# Altium PCB LEDArray8Key.PcbDoc (part 1 of 3)
Units mil, origin at the board's own origin, x right, y up, seen from the top; angles counter-clockwise.
Board outline 4724.41 x 3343 mil, 2 copper layers (Top Layer, Bottom Layer); 229 components, 203 nets, 838 pads, 171 vias.
Unrouted connection lines stored in the file: 34.
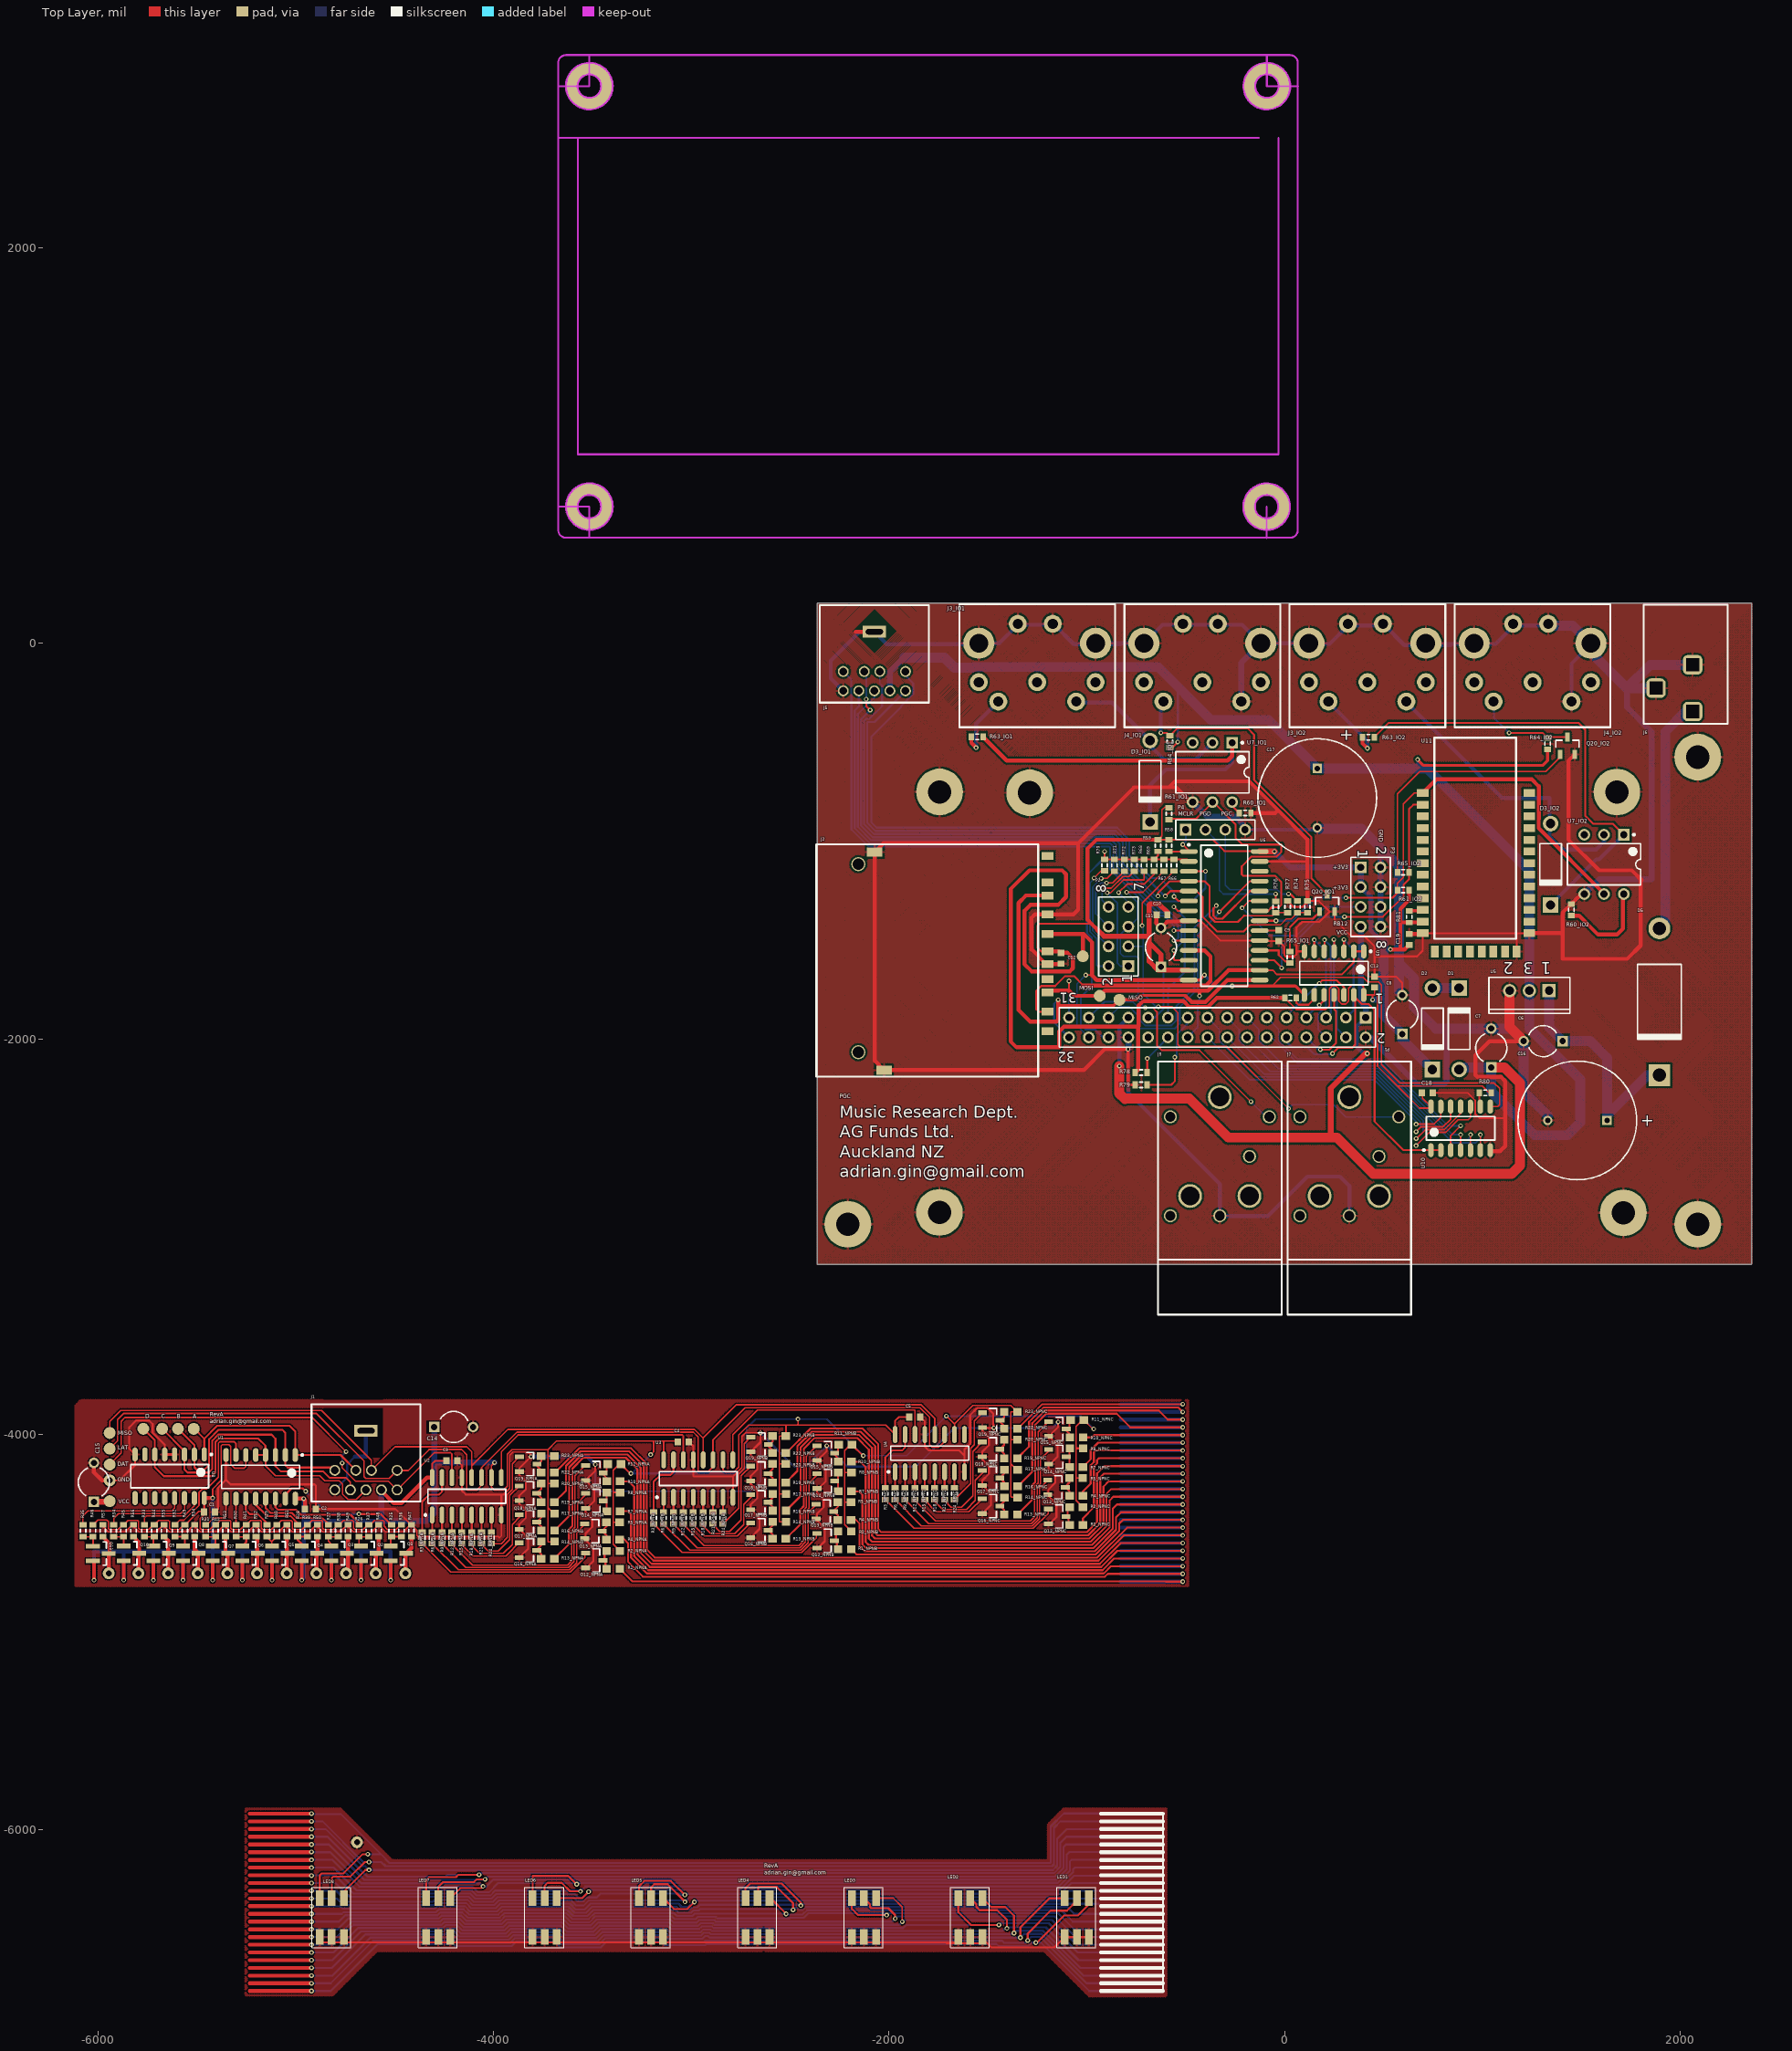
[diagram p0: Top Layer view]
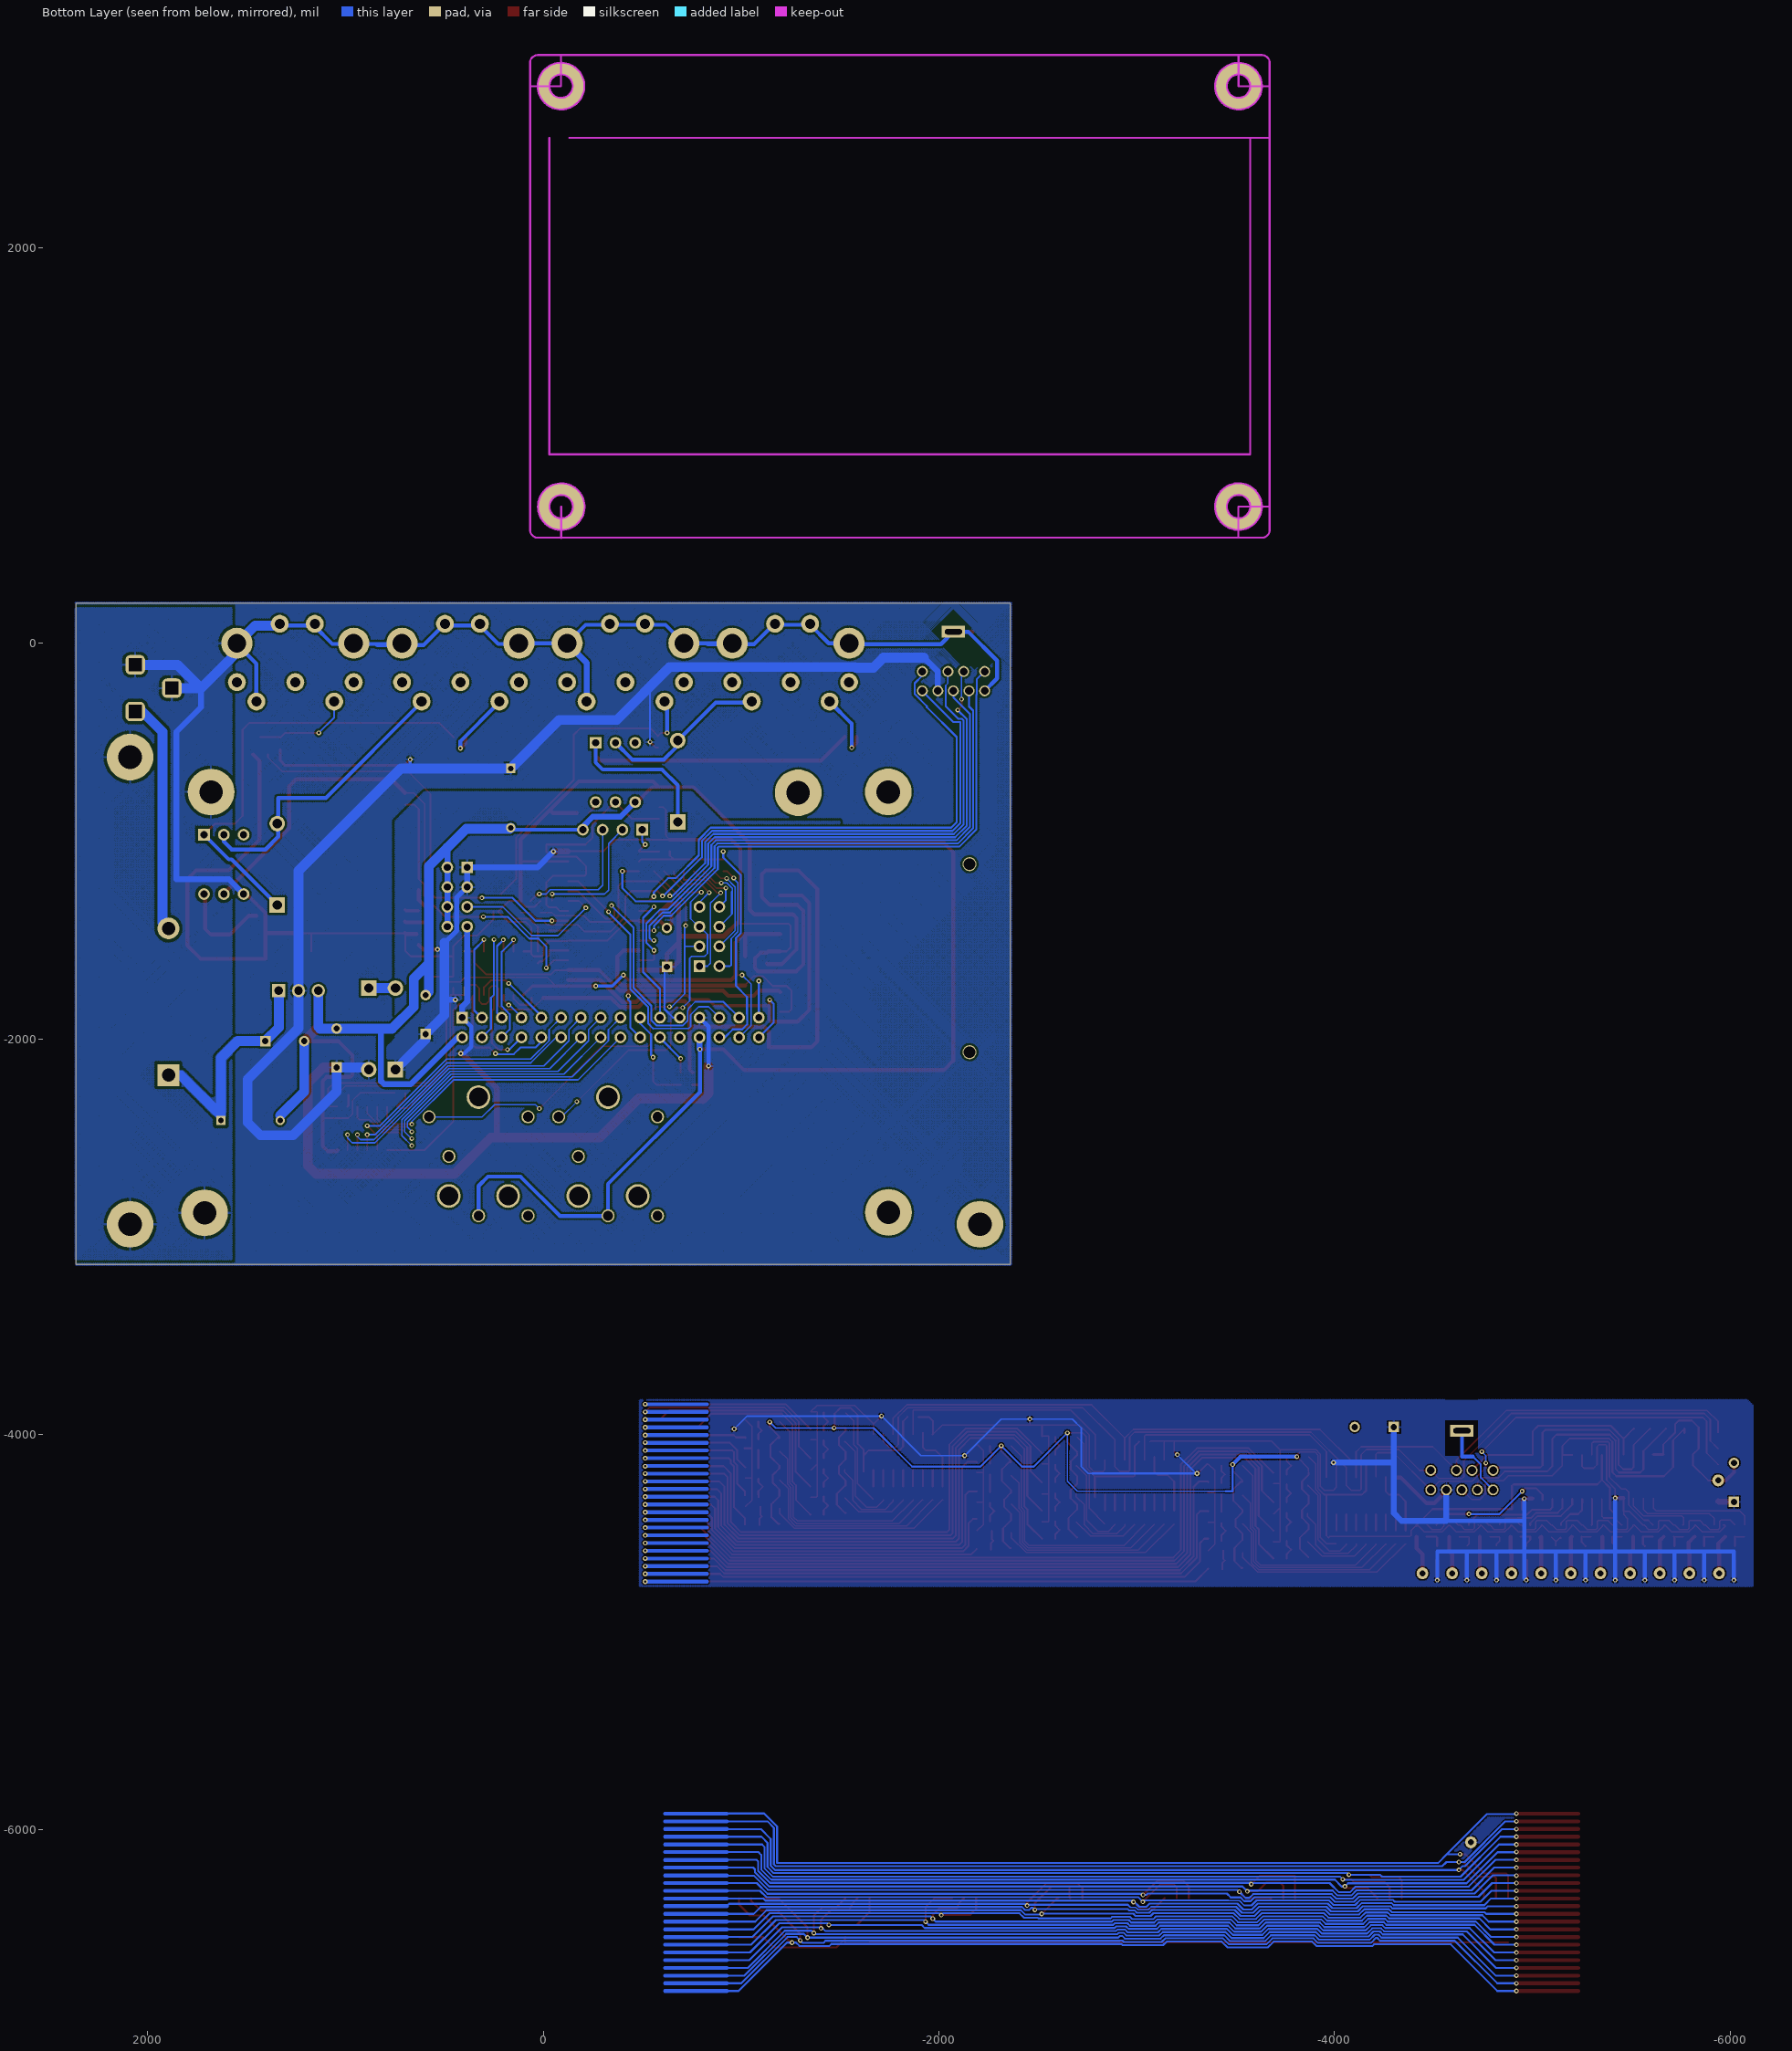
[diagram p1: Bottom Layer view, seen from below]

## Layer stack, top to bottom
Top Layer: signal copper 1.4
Dielectric: prepreg 12.6, FR-4, Dk 4.8
Bottom Layer: signal copper 1.4

## Board outline
-2362.2,-3140.15 2362.2,-3140.15 2362.2,202.85 -2362.2,202.85

## Design rules (kind name [scope] priority, off if disabled: settings)
Clearance Clearance_3 [InNamedPolygon('MB_3V3_B') Or  InNamedPolygon('MB_VCC_B') Or  InNamedPolygon('MB_GND_T') Or  InNamedPolygon('MB_VIN_B')] p1: gap=10
Clearance Clearance_2 [InNamedPolygon('MB_VCC_B') Or  InNamedPolygon('MB_VIN_B') Or  InNamedPolygon('MB_GND_T') Or  InNamedPolygon('MB_3V3_B')] p2: gap=15
Clearance Clearance_1 [InNamedPolygon('Top Layer-No Net') Or  InNamedPolygon('Top Layer-No Net') Or  InNamedPolygon('MB_GND_B') Or  InNamedPolygon('Top Layer-No Net') Or  InNamedPolygon('MB_VCC_B') Or  InNamedPolygon('GNDBOT') Or  InNamedPolygon('MB_3V3_B') Or  InNamedPolygon('tedi') Or  InNamedPolygon('Top Layer-No Net') Or  InNamedPolygon('VCCBOT')] p3: gap=15
Clearance [All] p4: gap=6
HoleSize [All] p1: absolutevalues=TRUE maxlimit=200 minlimit=11.81 maxpercent=80.000 minpercent=20.000
HoleToHoleClearance [All] p1: gap=3 allowstackedmicrovias=TRUE
MinimumAnnularRing [All] p1: minimumring=4
MinimumSolderMaskSliver [All] p1: minsoldermaskwidth=3.94
PolygonConnect [All] p1: connectstyle=Relief reliefconductorwidth=10 reliefentries=4 polygonreliefangle="90 Angle"
RoomDefinition IO2 [InComponentClass('IO2')] p1: confinementstyle=ConfineIn formatcopy=TRUE lockcomponents=FALSE outline 11.11,-444.35 11.11,207.69 1663.52,207.69 1663.52,-925.62 1814.05,-925.62 1814.05,-1310.68 1483.7,-1310.68 1483.7,-1407.36 1416.46,-1407.36 1416.46,-1376.43 1276.02,-1376.43 1276.02,-1281.77 540.87,-1281.77 540.87,-509.65 364.58,-509.65 364.58,-444.35
RoomDefinition PowerSupply [InComponentClass('PowerSupply')] p2: confinementstyle=ConfineIn formatcopy=TRUE lockcomponents=FALSE outline 502.4,-2015.73 502.4,-1739.73 678.45,-1739.73 678.45,-1691.55 1018.84,-1691.55 1018.84,-1596.5 1770.9,-1596.5 1770.9,-1374.17 1800.09,-1374.17 1800.09,209.11 2255.28,209.11 2255.28,-423.25 2019.25,-423.25 2019.25,-2252.13 1855.49,-2252.13 1855.49,-2727.09 1166.14,-2727.09 1166.14,-2208.11 678.45,-2208.11 678.45,-2015.73
RoomDefinition MainBoard [InComponentClass('MainBoard')] p3: confinementstyle=ConfineIn formatcopy=TRUE lockcomponents=FALSE outline -2382.52,-2207.05 -2382.52,-1001.85 -2364.36,-1001.85 -2364.36,206.85 -1783.18,206.85 -1783.18,-442.89 479.02,-442.89 479.02,-463.15 1280.16,-463.15 1280.16,-1602.17 1094.66,-1602.17 1094.66,-2630.47 655,-2630.47 655,-3410 -655,-3410 -655,-2266.77 -784.21,-2266.77 -784.21,-2207.05
RoomDefinition IO1 [InComponentClass('IO1')] p4: confinementstyle=ConfineIn formatcopy=TRUE lockcomponents=FALSE outline -1659.36,-440.2 -1659.36,211.85 -6.96,211.85 295.94,211.85 295.94,-1224.41 295.94,-1401.89 60.89,-1401.89 60.89,-1647.36 -6.35,-1647.36 -6.35,-956.43 -748.98,-956.43 -748.98,-506.77 -1613.57,-506.77 -1613.57,-440.2
RoomDefinition LEDArray [InComponentClass('LEDArray')] p5: confinementstyle=ConfineIn formatcopy=TRUE lockcomponents=FALSE outline -6112.64,-4381.15 -6112.64,-4105.15 -5865.43,-4105.15 -5865.43,-4034.83 -4934.92,-4034.83 -4934.92,-3833.15 -4353.74,-3833.15 -4353.74,-3870.47 -4063.07,-3870.47 -4063.07,-3879.53 -1810.71,-3879.53 -1810.71,-3935.9 -1575.14,-3935.9 -1575.14,-4255.12 -2745.82,-4255.12 -2745.82,-4383.69 -3916.26,-4383.69 -3916.26,-4473.18 -4373.48,-4473.18 -4373.48,-4717.86 -6086.39,-4717.86 -6086.39,-4582.36 -6108.54,-4582.36 -6108.54,-4381.15
RoomDefinition NPNB [InComponentClass('NPNB')] p6: confinementstyle=ConfineIn formatcopy=TRUE lockcomponents=FALSE outline -3224.92,-4683.15 -2034.92,-4683.15 -2034.92,-3943.15 -3224.92,-3943.15
RoomDefinition NPNC [InComponentClass('NPNC')] p7: confinementstyle=ConfineIn formatcopy=TRUE lockcomponents=FALSE outline -2054.09,-4560.55 -864.09,-4560.55 -864.09,-3820.55 -2054.09,-3820.55
RoomDefinition NPNA [InComponentClass('NPNA')] p8: confinementstyle=ConfineIn formatcopy=TRUE lockcomponents=FALSE outline -4394.92,-4783.15 -3204.92,-4783.15 -3204.92,-4043.15 -4394.92,-4043.15
RoomDefinition LED1 [InComponentClass('LED1')] p9: confinementstyle=ConfineIn formatcopy=TRUE lockcomponents=FALSE outline -4929.44,-6607.45 -4929.44,-6278.39 -942.15,-6278.39 -942.15,-6607.45
RoutingVias [All] p1: holewidth=11.02 width=23.62 viastyle="Through Hole" minholewidth=7.87 minwidth=19.68 maxholewidth=60 maxwidth=60
SilkToSilkClearance [All] p1: silktosilkclearance=6
SilkscreenOverComponentPads [All] p1: minsilkscreentomaskgap=3
SolderMaskExpansion [All] p1: expansion=3
Width [All] p1: maxlimit=393.7 minlimit=5 preferedwidth=6 minimp=50.000000 maximp=50.000000 favimp=50.000000
23 further rules are at their usual default settings.

## Classes and differential pairs
net class TX[1..2]: TX1 TX2
net class RX[1..2]: RX1 RX2
channel class MIDIInterface: 1 2
component class IO2: D3_IO2 J3_IO2 J4_IO2 Q20_IO2 R60_IO2 R61_IO2 R63_IO2 R64_IO2 R65_IO2 U7_IO2
component class IO1: D3_IO1 J3_IO1 J4_IO1 Q20_IO1 R60_IO1 R61_IO1 R63_IO1 R64_IO1 R65_IO1 U7_IO1
component class PowerSupply: C6 C7 C8 C16 D1 D2 D5 J6 U5
component class NPNC: Q12_NPNC Q13_NPNC Q14_NPNC Q15_NPNC Q16_NPNC Q17_NPNC Q18_NPNC Q19_NPNC R1_NPNC R2_NPNC R3_NPNC R4_NPNC R5_NPNC R6_NPNC R7_NPNC R8_NPNC R9_NPNC R10_NPNC R11_NPNC R12_NPNC R13_NPNC R14_NPNC R15_NPNC R16_NPNC R17_NPNC R18_NPNC R19_NPNC R20_NPNC R21_NPNC R22_NPNC R23_NPNC R24_NPNC
component class NPNB: Q12_NPNB Q13_NPNB Q14_NPNB Q15_NPNB Q16_NPNB Q17_NPNB Q18_NPNB Q19_NPNB R1_NPNB R2_NPNB R3_NPNB R4_NPNB R5_NPNB R6_NPNB R7_NPNB R8_NPNB R9_NPNB R10_NPNB R11_NPNB R12_NPNB R13_NPNB R14_NPNB R15_NPNB R16_NPNB R17_NPNB R18_NPNB R19_NPNB R20_NPNB R21_NPNB R22_NPNB R23_NPNB R24_NPNB
component class NPNA: Q12_NPNA Q13_NPNA Q14_NPNA Q15_NPNA Q16_NPNA Q17_NPNA Q18_NPNA Q19_NPNA R1_NPNA R2_NPNA R3_NPNA R4_NPNA R5_NPNA R6_NPNA R7_NPNA R8_NPNA R9_NPNA R10_NPNA R11_NPNA R12_NPNA R13_NPNA R14_NPNA R15_NPNA R16_NPNA R17_NPNA R18_NPNA R19_NPNA R20_NPNA R21_NPNA R22_NPNA R23_NPNA R24_NPNA
component class LEDArray: Adrian C1 C2 C3 C4 C5 C14 C15 J1 Q1 Q2 Q3 Q4 Q5 Q6 Q7 Q8 Q9 Q10 Q11 R25 R26 R27 R28 R29 R30 R31 R32 R33 R34 R35 R36 R37 R38 R39 R40 R41 R42 R43 R44 R45 R46 R47 R48 R49 R50 R51 R52 R53 R54 R55 R56 R57 U1 U2 U3 U4 U8
channel class NPNTransistorArray: NPNA NPNB NPNC
component class LED1: LED1 LED2 LED3 LED4 LED5 LED6 LED7 LED8
net class COM[1..8]: COM1 COM2 COM3 COM4 COM5 COM6 COM7 COM8 COM9 COM10 COM11
net class L[1..24]: L1 L2 L3 L4 L5 L6 L7 L8 L9 L10 L11 L12 L13 L14 L15 L16 L17 L18 L19 L20 L21 L22 L23 L24
component class MainBoard: C9 C10 C11 C12 C13 C17 C18 C19 J2 J5 J7 J8 P1 P2 P3 P4 R58 R59 R62 R66 R67 R68 R69 R70 R71 R72 R73 R74 R75 R76 R77 R78 R79 R80 R81 U6 U9 U10 U11

## Components (designator, comment, footprint, x,y, rotation, side; value= is the part's Value field where it differs from the comment)
C1 "Cap Semi" 1608[0603] -5434.92,-4393.15 r0 top
C2 "Cap Semi" 1608[0603] -4924.92,-4378.15 r0 top
C3 "Cap Semi" 1608[0603] -4209.92,-4133.57 r180 top
C4 "Cap Semi" 1608[0603] -3039.92,-4038.15 r180 top
C5 "Cap Semi" 1608[0603] -1869.92,-3913.15 r180 top
C6 "Cap2" CAPR5-4X5 1307.5,-2012.09 r180 top
C7 "Cap2" CAPR5-4X5 1045.08,-2046.86 r90 top
C8 "Cap2" CAPR5-4X5 595.08,-1877.73 r90 top
C9 "Cap Semi" 1608[0603] -29.92,-1478.15 r90 top
C10 "Cap Semi" 1608[0603] -619.92,-1373.15 r0 top
C11 "Cap2" CAPR5-4X5 -624.92,-1538.15 r90 top
C12 "Cap Semi" 1608[0603] -1129.92,-1593.15 r90 top
C13 "Cap Semi" 1608[0603] 455.08,-1713.15 r270 top
C14 "Cap2" CAPR5-4X5 -4201.07,-3963.15 r0 top
C15 "Cap2" CAPR5-4X5 -6019.96,-4243.15 r90 top
C16 "Cap Pol1" RB7.6-15 1480.08,-2413.15 r0 top
C17 "Cap Pol1" RB7.6-15 165.08,-783.15 r90 top
C18 "Cap Semi" 1608[0603] 722.08,-2273.15 r180 top
C19 "Cap Semi" 1608[0603] 630.08,-1498.15 r270 top
D1 "Diode 1N4004" DO-41 882.5,-1949.83 r90 top
D2 "Diode 1N4004" DO-41 747.5,-1949.83 r270 top
D3_IO1 "Diode 1N4004" DO-41 -679.92,-698.15 r270 top (schematic designator D3)
D3_IO2 "Diode 1N4004" DO-41 1345.08,-1118.15 r270 top (schematic designator D3)
D5 "5A Diode" DO-201AD 1895.08,-1813.15 r270 top
J1 "DIN9" 9MINIDIN -4919.92,-3848.15 r0 top
J2 "SDCard_SPI" SDCARD -2154.92,-1623.15 r90 top
J3_IO1 "MIDI_IN" DIN-5 -1644.36,196.85 r0 top (schematic designator J3)
J3_IO2 "MIDI_IN" DIN-5 25.08,196.85 r0 top (schematic designator J3)
J4_IO1 "MIDI_OUT" DIN-5 -809.36,196.85 r0 top (schematic designator J4)
J4_IO2 "MIDI_OUT" DIN-5 860.08,196.85 r0 top (schematic designator J4)
J5 "DIN9" 9MINIDIN -2349.36,191.85 r0 top
J6 "PWR2.5" PJ-102B 1878.08,-227.15 r0 top
J7 "Phonejack2" RN111PC 327.5,-3117 r0 top
J8 "Phonejack2" RN111PC -327.5,-3117 r0 top
LED1 "5050RGBLED" "5050 CRGBLED" -1050.58,-6443.91 r90 top
LED2 "5050RGBLED" "5050 CRGBLED" -1588.65,-6443.91 r90 top
LED3 "5050RGBLED" "5050 CRGBLED" -2126.72,-6443.91 r90 top
LED4 "5050RGBLED" "5050 CRGBLED" -2664.79,-6443.91 r90 top
LED5 "5050RGBLED" "5050 CRGBLED" -3202.86,-6443.91 r90 top
LED6 "5050RGBLED" "5050 CRGBLED" -3740.93,-6443.91 r90 top
LED7 "5050RGBLED" "5050 CRGBLED" -4279.01,-6443.91 r90 top
LED8 "5050RGBLED" "5050 CRGBLED" -4817.08,-6443.91 r90 top
P1 "Header 16X2" HDR2X16 410.08,-1893.15 r180 top
P2 "Header 4X2" HDR2X4 -789.92,-1633.15 r90 top
P3 "Header 4X2" HDR2X4 385.08,-1133.15 r270 top
P4 "Header 4" HDR1X4 -499.92,-943.15 r0 top
Q1 "BC807" SOT23-3M -4479.93,-4602.15 r0 top
Q2 "BC807" SOT23-3M -4629.93,-4602.15 r0 top (schematic designator Q1)
Q3 "BC807" SOT23-3M -4779.93,-4602.15 r0 top (schematic designator Q1)
Q4 "BC807" SOT23-3M -4929.93,-4602.15 r0 top (schematic designator Q1)
Q5 "BC807" SOT23-3M -5079.93,-4602.15 r0 top (schematic designator Q1)
Q6 "BC807" SOT23-3M -5229.93,-4602.15 r0 top (schematic designator Q1)
Q7 "BC807" SOT23-3M -5379.93,-4602.15 r0 top (schematic designator Q1)
Q8 "BC807" SOT23-3M -5529.93,-4602.15 r0 top (schematic designator Q1)
Q9 "BC807" SOT23-3M -5679.93,-4602.15 r0 top (schematic designator Q1)
Q10 "BC807" SOT23-3M -5829.93,-4602.15 r0 top (schematic designator Q1)
Q11 "BC807" SOT23-3M -5984.92,-4603.15 r0 top
Q12_NPNA "NPN" SOT95P230-3N -3489.92,-4638.15 r0 top (schematic designator Q12)
Q12_NPNB "NPN" SOT95P230-3N -2319.92,-4538.15 r0 top (schematic designator Q12)
Q12_NPNC "NPN" SOT95P230-3N -1149.09,-4415.55 r0 top (schematic designator Q12)
Q13_NPNA "NPN" SOT95P230-3N -3494.21,-4490.75 r0 top (schematic designator Q13)
Q13_NPNB "NPN" SOT95P230-3N -2324.21,-4390.75 r0 top (schematic designator Q13)
Q13_NPNC "NPN" SOT95P230-3N -1153.39,-4268.15 r0 top (schematic designator Q13)
Q14_NPNA "NPN" SOT95P230-3N -3489.21,-4336.61 r0 top (schematic designator Q14)
Q14_NPNB "NPN" SOT95P230-3N -2319.21,-4236.61 r0 top (schematic designator Q14)
Q14_NPNC "NPN" SOT95P230-3N -1148.39,-4114.02 r0 top (schematic designator Q14)
Q15_NPNA "NPN" SOT95P230-3N -3489.21,-4195.75 r0 top (schematic designator Q15)
Q15_NPNB "NPN" SOT95P230-3N -2319.21,-4095.75 r0 top (schematic designator Q15)
Q15_NPNC "NPN" SOT95P230-3N -1148.39,-3973.15 r0 top (schematic designator Q15)
Q16_NPNA "NPN" SOT95P230-3N -3824.92,-4586.17 r0 top (schematic designator Q16)
Q16_NPNB "NPN" SOT95P230-3N -2654.92,-4486.17 r0 top (schematic designator Q16)
Q16_NPNC "NPN" SOT95P230-3N -1484.09,-4363.57 r0 top (schematic designator Q16)
Q17_NPNA "NPN" SOT95P230-3N -3824.92,-4443.57 r0 top (schematic designator Q17)
Q17_NPNB "NPN" SOT95P230-3N -2654.92,-4343.57 r0 top (schematic designator Q17)
Q17_NPNC "NPN" SOT95P230-3N -1484.09,-4220.97 r0 top (schematic designator Q17)
Q18_NPNA "NPN" SOT95P230-3N -3824.92,-4298.57 r0 top (schematic designator Q18)
Q18_NPNB "NPN" SOT95P230-3N -2654.92,-4198.57 r0 top (schematic designator Q18)
Q18_NPNC "NPN" SOT95P230-3N -1484.09,-4075.97 r0 top (schematic designator Q18)
Q19_NPNA "NPN" SOT95P230-3N -3824.21,-4151.17 r0 top (schematic designator Q19)
Q19_NPNB "NPN" SOT95P230-3N -2654.21,-4051.17 r0 top (schematic designator Q19)
Q19_NPNC "NPN" SOT95P230-3N -1483.39,-3928.57 r0 top (schematic designator Q19)
Q20_IO1 "NPN" SOT95P230-3N 215.08,-1313.15 r90 top (schematic designator Q20)
Q20_IO2 "NPN" SOT95P230-3N 1430.08,-518.15 r90 top (schematic designator Q20)
R1_NPNA "Res3" J1-0603#1 -3394.21,-4680.75 r180 top (schematic designator R1)
R1_NPNB "Res3" J1-0603#1 -2224.21,-4580.75 r180 top (schematic designator R1)
R1_NPNC "Res3" J1-0603#1 -1053.39,-4458.15 r180 top (schematic designator R1)
R2_NPNA "Res3" J1-0603#1 -3394.21,-4590.75 r180 top (schematic designator R2)
R2_NPNB "Res3" J1-0603#1 -2224.21,-4490.75 r180 top (schematic designator R2)
R2_NPNC "Res3" J1-0603#1 -1053.39,-4368.15 r180 top (schematic designator R2)
R3_NPNA "Res3" J1-0603#2 -4359.92,-4523.57 r270 top (schematic designator R3)
R3_NPNB "Res3" J1-0603#2 -3189.92,-4423.57 r270 top (schematic designator R3)
R3_NPNC "Res3" J1-0603#2 -2019.09,-4300.97 r270 top (schematic designator R3)
R4_NPNA "Res3" J1-0603#1 -3395.92,-4533.15 r180 top (schematic designator R4)
R4_NPNB "Res3" J1-0603#1 -2224.92,-4433.15 r180 top (schematic designator R4)
R4_NPNC "Res3" J1-0603#1 -1052.92,-4310.15 r180 top (schematic designator R4)
R5_NPNA "Res3" J1-0603#1 -3394.92,-4444.21 r180 top (schematic designator R5)
R5_NPNB "Res3" J1-0603#1 -2224.92,-4344.21 r180 top (schematic designator R5)
R5_NPNC "Res3" J1-0603#1 -1054.09,-4221.61 r180 top (schematic designator R5)
R6_NPNA "Res3" J1-0603#2 -4309.92,-4523.57 r270 top (schematic designator R6)
R6_NPNB "Res3" J1-0603#2 -3139.92,-4423.57 r270 top (schematic designator R6)
R6_NPNC "Res3" J1-0603#2 -1969.09,-4300.97 r270 top (schematic designator R6)
R7_NPNA "Res3" J1-0603#1 -3393.21,-4388.78 r180 top (schematic designator R7)
R7_NPNB "Res3" J1-0603#1 -2223.21,-4288.78 r180 top (schematic designator R7)
R7_NPNC "Res3" J1-0603#1 -1052.38,-4166.18 r180 top (schematic designator R7)
R8_NPNA "Res3" J1-0603#1 -3392.86,-4293.97 r180 top (schematic designator R8)
R8_NPNB "Res3" J1-0603#1 -2222.86,-4193.97 r180 top (schematic designator R8)
R8_NPNC "Res3" J1-0603#1 -1052.03,-4071.37 r180 top (schematic designator R8)
R9_NPNA "Res3" J1-0603#2 -4259.92,-4523.57 r270 top (schematic designator R9)
R9_NPNB "Res3" J1-0603#2 -3089.92,-4423.57 r270 top (schematic designator R9)
R9_NPNC "Res3" J1-0603#2 -1919.09,-4300.97 r270 top (schematic designator R9)
R10_NPNA "Res3" J1-0603#1 -3392.75,-4238.26 r180 top (schematic designator R10)
R10_NPNB "Res3" J1-0603#1 -2222.75,-4138.26 r180 top (schematic designator R10)
R10_NPNC "Res3" J1-0603#1 -1051.93,-4015.67 r180 top (schematic designator R10)
R11_NPNA "Res3" J1-0603#1 -3389.21,-4150.75 r180 top (schematic designator R11)
R11_NPNB "Res3" J1-0603#1 -2219.92,-4052.15 r180 top (schematic designator R11)
R11_NPNC "Res3" J1-0603#1 -1048.39,-3928.15 r180 top (schematic designator R11)
R12_NPNA "Res3" J1-0603#2 -4209.92,-4523.57 r270 top (schematic designator R12)
R12_NPNB "Res3" J1-0603#2 -3039.92,-4423.57 r270 top (schematic designator R12)
R12_NPNC "Res3" J1-0603#2 -1869.09,-4300.97 r270 top (schematic designator R12)
R13_NPNA "Res3" J1-0603#1 -3724.92,-4628.57 r180 top (schematic designator R13)
R13_NPNB "Res3" J1-0603#1 -2554.92,-4528.57 r180 top (schematic designator R13)
R13_NPNC "Res3" J1-0603#1 -1384.09,-4405.97 r180 top (schematic designator R13)
R14_NPNA "Res3" J1-0603#1 -3724.41,-4542.6 r180 top (schematic designator R14)
R14_NPNB "Res3" J1-0603#1 -2554.41,-4442.6 r180 top (schematic designator R14)
R14_NPNC "Res3" J1-0603#1 -1383.58,-4320 r180 top (schematic designator R14)
R15_NPNA "Res3" J1-0603#2 -4159.92,-4523.57 r270 top (schematic designator R15)
R15_NPNB "Res3" J1-0603#2 -2989.92,-4423.57 r270 top (schematic designator R15)
R15_NPNC "Res3" J1-0603#2 -1819.09,-4300.97 r270 top (schematic designator R15)
R16_NPNA "Res3" J1-0603#1 -3724.21,-4486.17 r180 top (schematic designator R16)
R16_NPNB "Res3" J1-0603#1 -2554.21,-4386.17 r180 top (schematic designator R16)
R16_NPNC "Res3" J1-0603#1 -1383.39,-4263.57 r180 top (schematic designator R16)
R17_NPNA "Res3" J1-0603#1 -3724.21,-4401.17 r180 top (schematic designator R17)
R17_NPNB "Res3" J1-0603#1 -2554.21,-4301.17 r180 top (schematic designator R17)
R17_NPNC "Res3" J1-0603#1 -1383.39,-4178.57 r180 top (schematic designator R17)
R18_NPNA "Res3" J1-0603#2 -4109.92,-4523.57 r270 top (schematic designator R18)
R18_NPNB "Res3" J1-0603#2 -2939.92,-4423.57 r270 top (schematic designator R18)
R18_NPNC "Res3" J1-0603#2 -1769.09,-4300.97 r270 top (schematic designator R18)
R19_NPNA "Res3" J1-0603#1 -3724.92,-4343.57 r180 top (schematic designator R19)
R19_NPNB "Res3" J1-0603#1 -2554.92,-4243.57 r180 top (schematic designator R19)
R19_NPNC "Res3" J1-0603#1 -1384.09,-4120.97 r180 top (schematic designator R19)
R20_NPNA "Res3" J1-0603#1 -3724.92,-4249.63 r180 top (schematic designator R20)
R20_NPNB "Res3" J1-0603#1 -2554.92,-4149.63 r180 top (schematic designator R20)
R20_NPNC "Res3" J1-0603#1 -1384.09,-4027.03 r180 top (schematic designator R20)
R21_NPNA "Res3" J1-0603#2 -4059.92,-4523.57 r270 top (schematic designator R21)
R21_NPNB "Res3" J1-0603#2 -2889.92,-4423.57 r270 top (schematic designator R21)
R21_NPNC "Res3" J1-0603#2 -1719.09,-4300.97 r270 top (schematic designator R21)
R22_NPNA "Res3" J1-0603#1 -3724.92,-4193.15 r180 top (schematic designator R22)
R22_NPNB "Res3" J1-0603#1 -2554.92,-4094.15 r180 top (schematic designator R22)
R22_NPNC "Res3" J1-0603#1 -1384.09,-3971.15 r180 top (schematic designator R22)
R23_NPNA "Res3" J1-0603#1 -3724.92,-4109.63 r180 top (schematic designator R23)
R23_NPNB "Res3" J1-0603#1 -2554.92,-4009.63 r180 top (schematic designator R23)
R23_NPNC "Res3" J1-0603#1 -1384.09,-3887.03 r180 top (schematic designator R23)
R24_NPNA "Res3" J1-0603#2 -4009.92,-4523.57 r270 top (schematic designator R24)
R24_NPNB "Res3" J1-0603#2 -2839.92,-4423.57 r270 top (schematic designator R24)
R24_NPNC "Res3" J1-0603#2 -1669.09,-4300.97 r270 top (schematic designator R24)
R25 "Res3" J1-0603#2 -4514.92,-4488.15 r270 top
R26 "Res3" J1-0603#2 -4679.92,-4488.15 r270 top
R27 "Res3" J1-0603#2 -4834.92,-4488.15 r270 top
R28 "Res3" J1-0603#2 -4989.92,-4488.15 r270 top
R29 "Res3" J1-0603#2 -5144.92,-4488.15 r270 top
R30 "Res3" J1-0603#2 -5299.92,-4488.15 r270 top
R31 "Res3" J1-0603#2 -5454.92,-4488.15 r270 top
R32 "Res3" J1-0603#2 -5609.92,-4488.15 r270 top
R33 "Res3" J1-0603#2 -5764.92,-4488.15 r270 top
R34 "Res3" J1-0603#2 -5919.92,-4488.15 r270 top
R35 "Res3" J1-0603#2 -6074.92,-4488.15 r270 top
R36 "Res3" J1-0603#2 -4464.92,-4488.15 r270 top
R37 "Res3" J1-0603#2 -4629.92,-4488.15 r270 top
R38 "Res3" J1-0603#2 -4784.92,-4488.15 r270 top
R39 "Res3" J1-0603#2 -4939.92,-4488.15 r270 top
R40 "Res3" J1-0603#2 -5094.92,-4488.15 r270 top
R41 "Res3" J1-0603#2 -5249.92,-4488.15 r270 top
R42 "Res3" J1-0603#2 -5404.92,-4488.15 r270 top
R43 "Res3" J1-0603#2 -5559.92,-4488.15 r270 top
R44 "Res3" J1-0603#2 -5714.92,-4488.15 r270 top
R45 "Res3" J1-0603#2 -5869.92,-4488.15 r270 top
R46 "Res3" J1-0603#2 -6024.92,-4488.15 r270 top
R47 "Res3" J1-0603#2 -4414.92,-4488.15 r270 top
R48 "Res3" J1-0603#2 -4579.92,-4488.15 r270 top
R49 "Res3" J1-0603#2 -4734.92,-4488.15 r270 top
R50 "Res3" J1-0603#2 -4889.92,-4488.15 r270 top
R51 "Res3" J1-0603#2 -5044.92,-4488.15 r270 top
R52 "Res3" J1-0603#2 -5199.92,-4488.15 r270 top
R53 "Res3" J1-0603#2 -5354.92,-4488.15 r270 top
R54 "Res3" J1-0603#2 -5509.92,-4488.15 r270 top
R55 "Res3" J1-0603#2 -5664.92,-4488.15 r270 top
R56 "Res3" J1-0603#2 -5819.92,-4488.15 r270 top
R57 "Res3" J1-0603#2 -5974.92,-4488.15 r270 top
R58 "Res3" J1-0603#2 -584.92,-1023.15 r90 top
R59 "Res3" J1-0603#2 -639.92,-1023.15 r90 top
R60_IO1 "Res3" J1-0603#2 -199.92,-858.15 r0 top (schematic designator R60)
R60_IO2 "Res3" J1-0603#2 1450.08,-1348.15 r90 top (schematic designator R60)
R61_IO1 "Res3" J1-0603#2 -584.92,-861.98 r90 top (schematic designator R61)
R61_IO2 "Res3" J1-0603#2 600.08,-1248.15 r0 top (schematic designator R61)
R62 "Res3" J1-0603#2 30.08,-1793.15 r180 top
R63_IO1 "Res3" J1-0603#2 -1554.36,-473.15 r0 top (schematic designator R63)
R63_IO2 "Res3" J1-0603#2 423.79,-476.02 r0 top (schematic designator R63)
R64_IO1 "Res3" J1-0603#2 -579.92,-498.15 r270 top (schematic designator R64)
R64_IO2 "Res3" J1-0603#2 1329.61,-508.15 r270 top (schematic designator R64)
R65_IO1 "Res3" J1-0603#2 27.27,-1588.15 r270 top (schematic designator R65)
R65_IO2 "Res3" J1-0603#2 600.08,-1158.15 r0 top (schematic designator R65)
R66 "Res3" J1-0603#2 -559.06,-1122.36 r90 top
R67 "Res3" J1-0603#2 -609.92,-1123.15 r90 top
R68 "Res3" J1-0603#2 -709.92,-1122.68 r270 top
R69 "Res3" J1-0603#2 -659.92,-1122.68 r90 top
R70 "Res3" J1-0603#2 -909.92,-1122.15 r270 top
R71 "Res3" J1-0603#2 -859.92,-1122.68 r270 top
R72 "Res3" J1-0603#2 -809.92,-1122.68 r270 top
R73 "Res3" J1-0603#2 -759.92,-1122.68 r270 top
R74 "Res3" J1-0603#2 65.08,-1333.62 r270 top
R75 "Res3" J1-0603#2 115.08,-1333.15 r270 top
R76 "Res3" J1-0603#2 -44.92,-1334.15 r270 top
R77 "Res3" J1-0603#2 15.08,-1333.62 r270 top
R78 "Res3" J1-0603#2 -725,-2170.87 r180 top
R79 "Res3" J1-0603#2 -725,-2233.15 r0 top
R80 "Res3" J1-0603#2 1014.08,-2273.15 r0 top
R81 "Res3" J1-0603#2 630.08,-1383.15 r90 top
U1 "SN54HC138M" SOIC127P602-16BM -5176.92,-4215.15 r270 top
U2 "SN74HC595D" D016_N -4134.92,-4313.57 r90 top
U3 "SN74HC595D" D016_N -2964.48,-4224.09 r90 top
U4 "SN74HC595D" D016_N -1793.8,-4095.51 r90 top
U5 "LM323T" TO220ABN 1237.5,-1757.09 r180 top
U6 "PIC24HJ64GP202-I/SO" SOIC-SO28_N -304.92,-1378.15 r0 top
U7_IO1 "4N25" DIP-6 -364.92,-653.15 r270 top (schematic designator U7)
U7_IO2 "4N25" DIP-6 1615.08,-1118.15 r270 top (schematic designator U7)
U8 "SN54HC138M" SOIC127P602-16BM -5636.92,-4212.15 r270 top
U9 "SN74HC164M" SOIC127P600-14AM 250.08,-1668.15 r270 top
U10 "SN74HC164M" SOIC127P600-14AM 889.78,-2453.15 r90 top
U11 "HC-07 Bluetooth Module" BTMODULE 710.08,-478.15 r0 top

## Footprints (in the part's own frame and the unit in brackets; to place one, negate y for a bottom-side part, rotate by r counter-clockwise, add the part's x,y. Pads: shape width x height; smd on the part's side, far side on the other; paste and mask are expansions set on the pad)
9MINIDIN [mm] "CUI Inc. MD-90S"
  round 1.4 hole 1: 1(5.7,-8.5) 2(7.7,-8.5) 3(3,-8.5) 4(5,-11) 5(7,-11) 6(11,-8.5) 7(3,-11) 8(9,-11) 9(11,-11)
  rect 3x1.5 hole 2.2 slot 0.7 at 90 deg: C(7,-3.4)
  silkscreen extent 0,-12.5 14,0
1608[0603] [mm] "Chip Capacitor, Body 1.6x0.8mm, IPC High Density"
  rect 0.8x0.9 smd: 1(-0.7,0) 2(0.7,0)
  body extent -0.87,-0.48 0.87,0.48, height 1.3
"5050 CRGBLED" [mm] "5050 RGBLED"
  rect 2x1 smd: 1(-2.5,1.55) 2(2.5,1.55) 3(-2.5,0) 4(2.5,0) 5(-2.5,-1.55) 6(2.5,-1.55)
  silkscreen extent -3.85,-2.45 3.9,2.55
BTMODULE [mm]
  rect 1.5x1 smd: 1(-0.3,-7.1) 2(-0.3,-8.6) 3(-0.3,-10.1) 4(-0.3,-11.6) 5(-0.3,-13.1) 6(-0.3,-14.6) 7(-0.3,-16.1) 8(-0.3,-17.6) 9(-0.3,-19.1) 10(-0.3,-20.6) 11(-0.3,-22.1) 12(-0.3,-23.6) 13(-0.3,-25.1) 22(13.4,-25.1) 23(13.4,-23.6) 24(13.4,-22.1) 25(13.4,-20.6) 26(13.4,-19.1) 27(13.4,-17.6) 28(13.4,-16.1) 29(13.4,-14.6) 30(13.4,-13.1) 31(13.4,-11.6) 32(13.4,-10.1) 33(13.4,-8.6) 34(13.4,-7.1)
  rect 1x1.5 smd: 14(1.27,-27.47) 15(2.77,-27.47) 16(4.27,-27.47) 17(5.77,-27.47) 18(7.27,-27.47) 19(8.77,-27.47) 20(10.27,-27.47) 21(11.77,-27.47)
  silkscreen extent 1.2,-25.8 11.7,0
CAPR5-4X5 [mm] "Capacitor; 2 Leads"
  rect 1.35x1.35 hole 0.8: 1(-2.5,0)
  round 1.35 hole 0.8: 2(2.5,0)
  silkscreen extent -1.69,-2 1.82,2
D016_N [mm] "SOIC, 16-Leads, Body 9.9x3.9mm, Pitch 1.27mm, IPC Medium Density"
  oval 2.2x0.6 smd: 1(-2.4,4.445) 2(-2.4,3.175) 3(-2.4,1.905) 4(-2.4,0.635) 5(-2.4,-0.635) 6(-2.4,-1.905) 7(-2.4,-3.175) 8(-2.4,-4.445) 9(2.4,-4.445) 10(2.4,-3.175) 11(2.4,-1.905) 12(2.4,-0.635) 13(2.4,0.635) 14(2.4,1.905) 15(2.4,3.175) 16(2.4,4.445)
  silkscreen extent -2.52,-5 0.9,5.42, body extent -1.95,-4.95 1.95,4.95, height 1.75
DIN-5 [mm] "CUI Inc. SDS-50J"
  round 2.3 hole 1.3: 1(2.5,-10) 2(10,-10) 3(17.5,-10) 4(5,-12.5) 5(15,-12.5) C(7.5,-2.5) C(12,-2.5)
  round 4 hole 2.4: C(2.5,-5) C(17.5,-5)
  silkscreen extent 0,-15.8 20,0
DIP-6 [mm] "DIP; 6 Leads; Row Spacing 7.62 mm; Pitch 2.54 mm"
  rect 1.5x1.5 hole 0.9: 1(-3.81,2.54)
  round 1.5 hole 0.9: 2(-3.81,0) 3(-3.81,-2.54) 4(3.81,-2.54) 5(3.81,0) 6(3.81,2.54)
  silkscreen extent -3.93,-4.7 2.65,4.7, body extent -3.55,-4.7 3.55,4.7, height 5.46
DO-41 [mm] "Diode, Axial; Body 5.2 x 2.7 mm (LxDia. max), Lead Dia. 0.86 mm (max)"
  round 2 hole 1.2: 1(-5.23,0)
  rect 2x2 hole 1.2: 2(5.23,0)
  silkscreen extent -2.65,-1.4 2.75,1.4
DO-201AD [mm] "Diode, Axial; Body 9.5 x 5.6 mm (LxDia. max), Lead Dia. 1.32 mm (max)"
  round 2.8 hole 1.7: 1(-9.42,0)
  rect 2.8x2.8 hole 1.7: 2(9.42,0)
  silkscreen extent -4.8,-2.8 4.9,2.8
HDR1X4 [mm] "Connector; Header; 4 Position"
  rect 1.5x1.5 hole 0.9: 1(0,0)
  round 1.5 hole 0.9: 2(2.54,0) 3(5.08,0) 4(7.62,0)
  silkscreen extent -1.27,-1.27 8.89,1.27
HDR2X4 [mm] "Connector; Header; 4x2 Position"
  rect 1.5x1.5 hole 0.9: 1(0,0)
  round 1.5 hole 0.9: 2(0,2.54) 3(2.54,0) 4(2.54,2.54) 5(5.08,0) 6(5.08,2.54) 7(7.62,0) 8(7.62,2.54)
  silkscreen extent -1.27,-1.27 8.89,3.81
HDR2X16 [mm] "Connector; Header; 16x2 Position"
  rect 1.5x1.5 hole 0.9: 1(0,0)
  round 1.5 hole 0.9: 2(0,2.54) 3(2.54,0) 4(2.54,2.54) 5(5.08,0) 6(5.08,2.54) 7(7.62,0) 8(7.62,2.54) 9(10.16,0) 10(10.16,2.54) 11(12.7,0) 12(12.7,2.54) 13(15.24,0) 14(15.24,2.54) 15(17.78,0) 16(17.78,2.54) 17(20.32,0) 18(20.32,2.54) 19(22.86,0) 20(22.86,2.54) 21(25.4,0) 22(25.4,2.54) 23(27.94,0) 24(27.94,2.54) 25(30.48,0) 26(30.48,2.54) 27(33.02,0) 28(33.02,2.54) 29(35.56,0) 30(35.56,2.54) 31(38.1,0) 32(38.1,2.54)
  silkscreen extent -1.27,-1.27 39.37,3.81
J1-0603#1 [mm] "Chip Resistor; Body 1.6 x 0.8 mm (LxW typ)"
  rect 1.1x1 smd: 1(-0.85,0) 2(0.85,0)
J1-0603#2 [mm] "Chip Resistor, Body 1.6x0.8mm, IPC High Density"
  rect 0.7x0.9 smd: 1(-0.75,0) 2(0.75,0)
  silkscreen extent -0.2,-0.35 0.2,0.35, body extent -0.85,-0.48 0.85,0.48, height 0.9
PJ-102B [mm] "CUI Inc. PJ-102B"
  rrect50% 2.5x2.5 hole 1.65 square: 1(4.7,-3) 2(4.7,3) 3(0,0)
  silkscreen extent -1.6,-4.6 9.2,10.7
RB7.6-15 [mm] "Polarized Capacitor (Radial); 2 Leads"
  rect 1.2x1.2 hole 0.7: 1(3.81,0)
  round 1.2 hole 0.7: 2(-3.81,0)
  silkscreen extent -7.62,-7.62 7.62,7.62
RN111PC [mil]
  round 120 hole 95: MNT(-150,322) MNT(0,822) MNT(150,322)
  round 66 hole 50: RING(-250,222) RING_SH(-250,722) SLEEVE(0,222) TIP(250,722) TIP_SH(150,522)
  silkscreen extent -312,-278 312,1002
SDCARD [mm] "101-00313 SD SMD Push Type"
  rect 1x1.5 smd: 1(-6.1,-24.31) 2(-3.6,-24.31) 3(0,-24.31) 4(1.65,-24.31) 5(3.9,-24.31) 6(6.4,-24.31) 7(8.83,-24.31) 8(10.53,-24.31) 9(-8.6,-24.31) CD(-1.9,-24.31) WP(13.88,-24.31)
  rect 1.2x2 smd: GND(-13.6,-3.3) GND(14.4,-2.1)
  round 1.8 hole 1.5: ""(-11.3,0) ""(12.85,0)
  silkscreen extent -14.45,-23.1 15.4,5.4
SOIC127P600-14AM [mm] "SOIC, 14-Leads, Body 8.6x3.9mm, Pitch 1.27mm, IPC Low Density"
  oval 1.8x0.7 smd: 1(-2.8,3.81) 2(-2.8,2.54) 3(-2.8,1.27) 4(-2.8,0) 5(-2.8,-1.27) 6(-2.8,-2.54) 7(-2.8,-3.81) 8(2.8,-3.81) 9(2.8,-2.54) 10(2.8,-1.27) 11(2.8,0) 12(2.8,1.27) 13(2.8,2.54) 14(2.8,3.81)
  silkscreen extent -2.92,-4.4 1.5,4.84, body extent -2,-4.38 2,4.38, height 1.73
SOIC127P602-16BM [mm] "SOIC, 16-Leads, Body 9.9x3.9mm, Pitch 1.27mm, IPC Low Density"
  oval 1.8x0.7 smd: 1(-2.8,4.445) 2(-2.8,3.175) 3(-2.8,1.905) 4(-2.8,0.635) 5(-2.8,-0.635) 6(-2.8,-1.905) 7(-2.8,-3.175) 8(-2.8,-4.445) 9(2.8,-4.445) 10(2.8,-3.175) 11(2.8,-1.905) 12(2.8,-0.635) 13(2.8,0.635) 14(2.8,1.905) 15(2.8,3.175) 16(2.8,4.445)
  silkscreen extent -2.92,-5 1.5,5.47, body extent -2,-5 2,5, height 1.73
SOIC-SO28_N [mm] "SOIC, 28-Leads, Body 17.9x7.5mm, Pitch 1.27mm, IPC Medium Density"
  oval 2.3x0.6 smd: 1(-4.55,8.255) 2(-4.55,6.985) 3(-4.55,5.715) 4(-4.55,4.445) 5(-4.55,3.175) 6(-4.55,1.905) 7(-4.55,0.635) 8(-4.55,-0.635) 9(-4.55,-1.905) 10(-4.55,-3.175) 11(-4.55,-4.445) 12(-4.55,-5.715) 13(-4.55,-6.985) 14(-4.55,-8.255) 15(4.55,-8.255) 16(4.55,-6.985) 17(4.55,-5.715) 18(4.55,-4.445) 19(4.55,-3.175) 20(4.55,-1.905) 21(4.55,-0.635) 22(4.55,0.635) 23(4.55,1.905) 24(4.55,3.175) 25(4.55,4.445) 26(4.55,5.715) 27(4.55,6.985) 28(4.55,8.255)
  silkscreen extent -4.67,-9.05 3,9.23, body extent -3.8,-9.06 3.8,9.06, height 2.65
SOT23-3M [mm] "SOT23, 3-Leads, Body 2.9x1.3mm, Pitch 0.95mm, Lead Span 2.5mm, IPC Low Density"
  rect 1.8x0.6 smd: 1(-1,0.95) 2(-1,-0.95) 3(1,0)
  silkscreen extent 0.3,-1.5 0.7,1.5, body extent -0.7,-1.5 0.7,1.5, height 1.1
SOT95P230-3N [mm] "SOT23, 3-Leads, Body 2.9x1.3mm, Pitch 0.95mm, Lead Span 2.3mm - Alternate Lead Configuration, IPC Medium Density"
  rect 1.15x0.6 smd: 1(1.125,0) 2(-1.125,0.95) 3(-1.125,-0.95)
  silkscreen extent -0.2,-1.5 0.7,1.5, body extent -0.7,-1.5 0.7,1.5, height 1.1
TO220ABN [mm] "TO, Thru-Hole, Vertical, Heatsink Mounted; 3 In-Line Leads; Pitch 2.54 mm; Pin sequence 1, 3, 2"
  rect 1.7x1.7 hole 1.1: 1(-2.54,0)
  round 1.7 hole 1.1: 2(2.54,0) 3(0,0)
  silkscreen extent -5.2,-1.7 5.2,2.9

## Part data
C1 C2 C3 C4 C5 C9 C10 C12 C13 C18 C19: "Capacitor (Semiconductor SIM Model)"
C6 C7 C8 C11 C14 C15: "Capacitor"
C16 C17: "Polarized Capacitor (Radial)"
D1 D2 D3_IO1 D3_IO2: "1 Amp General Purpose Rectifier"
D5: library part "Diode 1N5404", "3 Amp General Purpose Rectifier"
J1 J5: library part mDIN9, "MINIDIN9"
J3_IO1 J3_IO2 J4_IO1 J4_IO2: library part DIN5, "DIN5"
J6: "Low Voltage Power Supply Connector"
J7 J8: "Jack Socket, 1/4\" [6.5mm], Thru-Hole, Vertical, 2-Conductor Open Circuit"
LED1 LED2 LED3 LED4 LED5 LED6 LED7 LED8: "5050 RGB LED"
P1: "Header, 16-Pin, Dual row"
P2 P3: "Header, 4-Pin, Dual row"
P4: "Header, 4-Pin"
Q1 Q2 Q3 Q4 Q5 Q6 Q7 Q8 Q9 Q10 Q11: "PNP General Purpose Amplifier"
Q12_NPNA Q12_NPNB Q12_NPNC Q13_NPNA Q13_NPNB Q13_NPNC Q14_NPNA Q14_NPNB Q14_NPNC Q15_NPNA Q15_NPNB Q15_NPNC Q16_NPNA Q16_NPNB Q16_NPNC Q17_NPNA Q17_NPNB Q17_NPNC Q18_NPNA Q18_NPNB Q18_NPNC Q19_NPNA Q19_NPNB Q19_NPNC Q20_IO1 Q20_IO2: "NPN Bipolar Transistor"
R1_NPNA R1_NPNB R1_NPNC R2_NPNA R2_NPNB R2_NPNC R3_NPNA R3_NPNB R3_NPNC R4_NPNA R4_NPNB R4_NPNC R5_NPNA R5_NPNB R5_NPNC R6_NPNA R6_NPNB R6_NPNC R7_NPNA R7_NPNB R7_NPNC R8_NPNA R8_NPNB R8_NPNC R9_NPNA R9_NPNB R9_NPNC R10_NPNA R10_NPNB R10_NPNC R11_NPNA R11_NPNB R11_NPNC R12_NPNA R12_NPNB R12_NPNC R13_NPNA R13_NPNB R13_NPNC R14_NPNA R14_NPNB R14_NPNC R15_NPNA R15_NPNB R15_NPNC R16_NPNA R16_NPNB R16_NPNC R17_NPNA R17_NPNB R17_NPNC R18_NPNA R18_NPNB R18_NPNC R19_NPNA R19_NPNB R19_NPNC R20_NPNA R20_NPNB R20_NPNC R21_NPNA R21_NPNB R21_NPNC R22_NPNA R22_NPNB R22_NPNC R23_NPNA R23_NPNB R23_NPNC R24_NPNA R24_NPNB R24_NPNC R25 R26 R27 R28 R29 R30 R31 R32 R33 R34 R35 R36 R37 R38 R39 R40 R41 R42 R43 R44 R45 R46 R47 R48 R49 R50 R51 R52 R53 R54 R55 R56 R57 R58 R59 R60_IO1 R60_IO2 R61_IO1 R61_IO2 R62 R63_IO1 R63_IO2 R64_IO1 R64_IO2 R65_IO1 R65_IO2 R66 R67 R68 R69 R70 R71 R72 R73 R74 R75 R76 R77 R78 R79 R80 R81: "Resistor"
U1 U8: library part SN54HC138J, "3-Line to 8-Line Decoder / Demultiplexer"
U2 U3 U4: "8-Bit Shift Register with 3-State Output Registers"
U5: "Three Terminal 3A-5V Positive Voltage Regulator"
U6: "High Speed General Purpose 16-Bit Flash Microcontroller, 64KB Flash, 8KB RAM, 28-Pin SOIC, Industrial Temperature"
U7_IO1 U7_IO2: "Optocoupler, Phototransistor Output, Dual Channel, TTL Compatible, Pb-free"
U9 U10: "8-Bit Parallel-Out Serial Shift Register"
U11: library part BTModule

## Free pads (board coordinates)
  round 60 smd: 0(-5939.92,-4338.15) 0(-5939.92,-4153.15) 0(-5939.92,-4073.15) 0(-5939.92,-3993.15) 0(-5770,-3972.21) 0(-5674.92,-3972.21) 0(-5594.92,-3972.21) 0(-5514.92,-3972.21) 0(-1019.97,-1583.15) 0(-934.92,-1783.15) 0(-834.92,-1803.15)
  round 60 hole 30: 0(-5939.92,-4233.15) 1(-5944.92,-4703.15) 1(-5794.92,-4703.15) 1(-5644.92,-4703.15) 1(-5494.92,-4703.15) 1(-5344.92,-4703.15) 1(-5194.92,-4703.15) 1(-5044.92,-4703.15) 1(-4894.92,-4703.15) 1(-4744.92,-4703.15) 1(-4689.92,-6063.15) 1(-4594.92,-4703.15) 1(-4444.92,-4703.15)
  round 236.22 hole 118.11: LCD_MNT(-1745.12,-2878.15) LCD_MNT(-1744.1,-751.77) LCD_MNT(1679.91,-752.17) LCD_MNT(1712.6,-2880) PCBMNT(-2207.92,-2938.15) PCBMNT(-1288.92,-756.15) PCBMNT(2089.08,-2938.15) PCBMNT(2089.08,-575.95) ""(-3514.92,2816.85) ""(-3514.76,690.87) ""(-90.74,690.47) ""(-89.73,2816.85)

## Via types
v1: diameter 23.62, hole 11.81, Top Layer to Bottom Layer, 171 vias

## Nets (pads, with @x,y where several pads share a name; then routed paths per layer and width w, separated by ;. In a path a pad name is that pad's centre, name@x,y a point inside that pad or via, vN(x,y) a via of type N, cw(c..) or ccw(c..) an arc to the next point about the centre after c; other vN are vias at no path point)
+3V3: C8.1 C10.2 C11.1 C12.2 C13.2 C18.2 C19.2 D2.2 J2.4 P1.23 P3.1 P3.3 R58.2 R59.2 R61_IO1.2 R61_IO2.2 R62.2 R78.2 R80.2 R81.1 U6.13 U6.28 U9.14 U10.14 U11.12 | length 11915.9
  Top Layer w8: R59.2@-639.92,-993.62 -619.92,-973.62 -619.92,-843.15 -605.39,-828.62 R61_IO1.2@-584.92,-828.62 ; R62.2@0.55,-1793.15 59.21,-1851.81 208.15,-1851.81 226.3,-1833.66 226.3,-1746.88 240.23,-1732.95 259.93,-1732.95 273.86,-1746.88 273.86,-1808.86 290,-1825 308.75,-1825 323.86,-1809.89 323.86,-1744.37 340.08,-1728.15 390.08,-1728.15 400.08,-1738.15 U9.14@400.08,-1778.39 445.08,-1778.39 ; v1(445.08,-1803.15) 445.08,-1778.39 ; C13.2@455.08,-1740.71 455.08,-1778.39 ; C18.2@697.52,-2273.15 697.52,-2300.65 U10.14@739.78,-2342.91 731.98,-2350.71 682.27,-2350.71 570.14,-2238.58 ; R80.2@1044.31,-2283.15 999.74,-2238.58 570.14,-2238.58 ; 445.08,-1778.39 455.08,-1778.39 ; 455.08,-1778.39 469.84,-1778.39 470.08,-1778.15 470.08,-2138.52 570.14,-2238.58
  Top Layer w10: J2.4@-1197.84,-1558.19 -1229.88,-1558.19 -1249.92,-1538.15 -1249.92,-1428.15 -1239.92,-1418.15 -976.23,-1418.15 ; R59.2@-639.92,-993.62 R58.2@-584.92,-993.62 -362.26,-993.62 -304.92,-1050.96 -127.98,-1050.96 U6.28@-125.79,-1053.15
  Top Layer w20: J2.4@-1197.84,-1558.19 -1137.32,-1558.19 C12.2@-1129.92,-1565.59 -1097.48,-1565.59 -1069.92,-1593.15 -1069.92,-1643.15 -1085.61,-1658.84 -1279.24,-1658.84 -1314.92,-1623.15 -1314.92,-1353.15 -1284.92,-1323.15 -1144.92,-1323.15 -1104.92,-1283.15 -1104.92,-1168.15 -1124.92,-1148.15 -1289.92,-1148.15 -1384.92,-1243.15 -1384.92,-2013.15 -1354.92,-2043.15 -1139.92,-2043.15 -1139.92,-1963.15 -1115.45,-1938.68 -740.45,-1938.68 -739.92,-1938.15 ; -946.14,-1448.25 -976.23,-1418.15 -995.92,-1398.46 -995.92,-1038.15 -951.39,-993.62 R59.2@-639.92,-993.62 ; R78.2@-754.53,-2170.87 -739.92,-2156.26 -739.92,-1938.15 ; R62.2@0.55,-1793.15 -342.15,-1793.15 -389.15,-1840.15 -480.53,-1840.15 -511.72,-1808.96 -714.92,-1808.96 -723.27,-1817.31 -723.59,-1817.31 -738.73,-1832.45 -738.73,-1936.96 -739.92,-1938.15 ; v1(535.08,-1548.15) 585.08,-1548.15 ; R61_IO2.2@629.61,-1248.15 629.61,-1298.62 585.08,-1343.15 585.08,-1408.15 ; C19.2@630.08,-1525.71 607.64,-1548.15 585.08,-1548.15 ; U11.12@698.27,-1407.28 694.36,-1411.2 588.12,-1411.2 585.08,-1408.15 ; 585.08,-1548.15 585.08,-1408.15
  Top Layer w25: -946.14,-1448.25 -913.21,-1481.18 -692.95,-1481.18 -684.92,-1473.15 ; C11.1@-624.92,-1636.58 -624.92,-1573.15 -684.92,-1513.15 ; C10.2@-592.36,-1373.15 -592.36,-1360.71 -634.92,-1318.15 -679.92,-1318.15 -684.92,-1323.15 -684.92,-1473.15 ; U6.13@-484.06,-1653.15 -639.92,-1653.15 -684.92,-1608.15 -684.92,-1513.15 ; -684.92,-1513.15 -684.92,-1473.15
  Top Layer w30: U6.28@-125.79,-1053.15 v1(-51.47,-1053.15)
  Bottom Layer w10: P1.23@-689.92,-1893.15 -656.15,-1893.15 -613,-1850 -613,-1648.5 C11.1@-624.92,-1636.58
  Bottom Layer w20: 500.08,-1548.15 v1(535.08,-1548.15)
  Bottom Layer w25: P3.3@385.08,-1233.15 437.05,-1285.12 437.05,-1453.04 499.53,-1515.53 500.08,-1515.53
  Bottom Layer w30: v1(-51.47,-1053.15) 28.53,-1133.15 P3.1@385.08,-1133.15 P3.3@385.08,-1233.15 ; v1(445.08,-1803.15) 500.08,-1803.15
  Bottom Layer w50: 500.08,-1515.53 500.08,-1548.15 500.08,-1803.15 500.08,-1881.16 C8.1@595.08,-1976.16 595.08,-2003.31 D2.2@747.5,-2155.74
A: J1.1 J5.1 pad.0@-5514.92,-3972.21 U1.1 U6.3 U8.1 | length 4080.4
  Top Layer w10: pad.0@-5514.92,-3972.21 -5511.86,-3972.21 -5461.92,-4022.15 ; U8.1@-5461.92,-4101.91 -5461.92,-4022.15 ; J1.1@-4695.51,-4182.8 -4695.51,-4182.59 -4773.19,-4104.91 U1.1@-5001.92,-4104.91 -5001.92,-3985.15 -5029.92,-3957.15 -5396.92,-3957.15 -5461.92,-4022.15 ; v1(-2114.92,-283.15) -2114.92,-318.15 v1(-2094.92,-338.15) ; U6.3@-484.06,-1153.15 v1(-399.92,-1153.15)
  Bottom Layer w8: J5.1@-2124.64,-142.8 J5.1@-2124.95,-142.8 -2114.92,-152.82 v1(-2114.92,-283.15)
  Bottom Layer w10: v1(-2094.92,-338.15) -2141.36,-384.59 -2141.36,-921.89 -2082.4,-980.85 -866.34,-980.85 -833.92,-1013.27 -833.92,-1119.15 -648.31,-1304.76 -466.53,-1304.76 -399.92,-1238.15 v1(-399.92,-1153.15)
B: J1.3 J5.3 pad.0@-5594.92,-3972.21 U1.2 U6.9 U8.2 | length 4095.6
  Top Layer w10: pad.0@-5594.92,-3972.21 -5511.92,-4055.21 U8.2@-5511.92,-4101.91 -5511.92,-4167.15 -5501.92,-4177.15 -5460,-4177.15 -5437,-4154.15 -5437,-4024.97 -5389.18,-3977.15 -5066.92,-3977.15 -5051.92,-3992.15 U1.2@-5051.92,-4104.91 -5051.92,-4156.15 -5039.92,-4168.15 -4816.46,-4168.15 J1.3@-4801.81,-4182.8 ; v1(-559.92,-1453.15) U6.9@-484.06,-1453.15
  Bottom Layer w10: J5.3@-2231.25,-142.8 -2191.07,-182.98 -2191.07,-258.9 -2189.36,-260.61 -2189.36,-941.77 -2102.28,-1028.85 -886.22,-1028.85 -881.92,-1033.15 -881.92,-1142.66 -646.43,-1378.15 -609.92,-1378.15 -559.92,-1428.15 v1(-559.92,-1453.15)
B1_NPNA: R3_NPNA.1 U2.15 | length 341.7
  Top Layer w10: R3_NPNA.1@-4359.92,-4486.17 -4359.92,-4339.63 -4324.92,-4304.63 -4274.92,-4304.63 -4259.92,-4289.63 U2.15@-4259.92,-4215.14
B1_NPNB: R3_NPNB.1 U3.15 | length 341.7
  Top Layer w10: R3_NPNB.1@-3189.92,-4386.17 -3189.92,-4239.63 -3154.92,-4204.63 -3104.92,-4204.63 -3089.92,-4189.63 U3.15@-3089.92,-4115.14
B1_NPNC: R3_NPNC.1 U4.15 | length 341.7
  Top Layer w10: R3_NPNC.1@-2019.09,-4263.57 -2019.09,-4117.03 -1984.09,-4082.03 -1934.09,-4082.03 -1919.09,-4067.03 U4.15@-1919.09,-3992.55
B2_NPNA: R6_NPNA.1 U2.1 | length 82
  Top Layer w10: R6_NPNA.1@-4309.92,-4486.17 U2.1@-4309.92,-4404.12
B2_NPNB: R6_NPNB.1 U3.1 | length 82
  Top Layer w10: R6_NPNB.1@-3139.92,-4386.17 U3.1@-3139.92,-4304.12
B2_NPNC: R6_NPNC.1 U4.1 | length 82
  Top Layer w10: R6_NPNC.1@-1969.09,-4263.57 U4.1@-1969.09,-4181.52
B3_NPNA: R9_NPNA.1 U2.2 | length 82
  Top Layer w10: R9_NPNA.1@-4259.92,-4486.17 U2.2@-4259.92,-4404.12
B3_NPNB: R9_NPNB.1 U3.2 | length 82
  Top Layer w10: R9_NPNB.1@-3089.92,-4386.17 U3.2@-3089.92,-4304.12
B3_NPNC: R9_NPNC.1 U4.2 | length 82
  Top Layer w10: R9_NPNC.1@-1919.09,-4263.57 U4.2@-1919.09,-4181.52
B4_NPNA: R12_NPNA.1 U2.3 | length 82
  Top Layer w10: R12_NPNA.1@-4209.92,-4486.17 U2.3@-4209.92,-4404.12
B4_NPNB: R12_NPNB.1 U3.3 | length 82
  Top Layer w10: R12_NPNB.1@-3039.92,-4386.17 U3.3@-3039.92,-4304.12
B4_NPNC: R12_NPNC.1 U4.3 | length 82
  Top Layer w10: R12_NPNC.1@-1869.09,-4263.57 U4.3@-1869.09,-4181.52
B5_NPNA: R15_NPNA.1 U2.4 | length 82
  Top Layer w10: R15_NPNA.1@-4159.92,-4486.17 U2.4@-4159.92,-4404.12
B5_NPNB: R15_NPNB.1 U3.4 | length 82
  Top Layer w10: R15_NPNB.1@-2989.92,-4386.17 U3.4@-2989.92,-4304.12
B5_NPNC: R15_NPNC.1 U4.4 | length 82
  Top Layer w10: R15_NPNC.1@-1819.09,-4263.57 U4.4@-1819.09,-4181.52
B6_NPNA: R18_NPNA.1 U2.5 | length 82
  Top Layer w10: R18_NPNA.1@-4109.92,-4486.17 U2.5@-4109.92,-4404.12
B6_NPNB: R18_NPNB.1 U3.5 | length 82
  Top Layer w10: R18_NPNB.1@-2939.92,-4386.17 U3.5@-2939.92,-4304.12
B6_NPNC: R18_NPNC.1 U4.5 | length 82
  Top Layer w10: R18_NPNC.1@-1769.09,-4263.57 U4.5@-1769.09,-4181.52
B7_NPNA: R21_NPNA.1 U2.6 | length 82
  Top Layer w10: R21_NPNA.1@-4059.92,-4486.17 U2.6@-4059.92,-4404.12
B7_NPNB: R21_NPNB.1 U3.6 | length 82
  Top Layer w10: R21_NPNB.1@-2889.92,-4386.17 U3.6@-2889.92,-4304.12
B7_NPNC: R21_NPNC.1 U4.6 | length 82
  Top Layer w10: R21_NPNC.1@-1719.09,-4263.57 U4.6@-1719.09,-4181.52
B8_NPNA: R24_NPNA.1 U2.7 | length 82
  Top Layer w10: R24_NPNA.1@-4009.92,-4486.17 U2.7@-4009.92,-4404.12
B8_NPNB: R24_NPNB.1 U3.7 | length 82
  Top Layer w10: R24_NPNB.1@-2839.92,-4386.17 U3.7@-2839.92,-4304.12
B8_NPNC: R24_NPNC.1 U4.7 | length 82
  Top Layer w10: R24_NPNC.1@-1669.09,-4263.57 U4.7@-1669.09,-4181.52
BL_CNT: P1.27 U6.25 | length 1390.2
  Top Layer w10: v1(-329.92,-1358.15) -174.92,-1203.15 U6.25@-125.79,-1203.15
  Bottom Layer w8: P1.27@-889.92,-1893.15 -835.13,-1838.36 -784.92,-1838.36 -744.92,-1878.36 -744.92,-1938.15 -734.92,-1948.15 -554.92,-1948.15
  Bottom Layer w10: -554.92,-1948.15 -529.92,-1923.15 -529.92,-1910.46 -530.45,-1909.94 -530.45,-1840.21 -439.92,-1749.68 -439.92,-1473.15 -329.92,-1363.15 v1(-329.92,-1358.15)
C: J1.4 J5.4 pad.0@-5674.92,-3972.21 U1.3 U6.10 U8.3 | length 4254.6
  Top Layer w8: -5438.37,-4193.15 -5421,-4175.78 -5421,-4031.6 ; -4890,-4188.15 -4859.92,-4188.15 -4827.72,-4220.35 -4744.02,-4220.35 -4723.07,-4241.3 J1.4@-4723.07,-4281.22
  Top Layer w10: pad.0@-5674.92,-3972.21 -5561.92,-4085.21 U8.3@-5561.92,-4101.91 -5561.92,-4177.15 -5545.92,-4193.15 -5438.37,-4193.15 ; -5421,-4031.6 -5391.55,-4002.15 -5121.92,-4002.15 -5101.92,-4022.15 U1.3@-5101.92,-4104.91 -5101.92,-4161.15 -5074.92,-4188.15 -4890,-4188.15 ; v1(-559.92,-1503.15) U6.10@-484.06,-1503.15
  Bottom Layer w10: J5.4@-2152.51,-241.22 -2152.51,-320 -2173.36,-340.85 -2173.36,-935.14 -2095.65,-1012.85 -879.59,-1012.85 -865.92,-1026.52 -865.92,-1136.03 -639.8,-1362.15 -603.29,-1362.15 -536.92,-1428.52 -536.92,-1490.15 -549.92,-1503.15 v1(-559.92,-1503.15)
CLK: J1.2 J5.2 pad.0@-5939.92,-3993.15 R76.2 R77.2 U2.12 U3.12 U4.12 U6.4 | length 8394.3
  Top Layer w7: -204.92,-1378.15 -60.39,-1378.15 -44.92,-1362.68 14.61,-1362.68 R77.2@15.08,-1363.15
  Top Layer w8: pad.0@-5939.92,-3993.15 -5939.92,-3935.72 -5883.68,-3879.47 -4868.6,-3879.47 -4616.77,-4131.3 J1.2@-4616.77,-4182.8 -4497.13,-4063.15 -4134.92,-4063.15 -4109.92,-4088.15 -4109.92,-4158.41 ; U2.12@-4109.92,-4219.08 -4109.92,-4158.41 ; U3.12@-2939.48,-4129.6 -2939.48,-4017.71 ; U4.12@-1768.8,-4001.02 -1768.8,-3919.31 -1836.96,-3851.15 -2772.92,-3851.15 -2939.48,-4017.71 ; -4109.92,-4158.41 -3926.67,-3975.15 -2983.12,-3975.15 -2940.56,-4017.71 -2939.48,-4017.71
  Top Layer w10: v1(-639.92,-1278.15) -639.92,-1263.15 -579.92,-1203.15 U6.4@-484.06,-1203.15 -404.92,-1203.15 -379.42,-1228.65 -379.42,-1381.28 -351.55,-1409.15 -235.92,-1409.15 -204.92,-1378.15
  Bottom Layer w7: J5.2@-2046.21,-142.8 -2046.21,-202.85 -2034.92,-214.13
  Bottom Layer w10: -2034.92,-214.13 -2034.92,-318.15 -2098.92,-382.15 -2115.99,-382.15 -2125.36,-391.52 -2125.36,-915.26 -2075.77,-964.85 -859.71,-964.85 -817.92,-1006.64 -817.92,-1112.52 -652.29,-1278.15 v1(-639.92,-1278.15)
COM1: LED1.1 LED1.3 LED1.5 LED2.1 LED2.3 LED2.5 LED3.1 LED3.3 LED3.5 LED4.1 LED4.3 LED4.5 LED5.1 LED5.3 LED5.5 LED6.1 LED6.3 LED6.5 LED7.1 LED7.3 LED7.5 LED8.1 LED8.3 LED8.5 pad.1@-4444.92,-4703.15 pad.1@-4689.92,-6063.15 Q1.3 R47.2 | length 4199
  Top Layer w10: LED8.1@-4877.1,-6569.33 -4817.08,-6569.33 -4279.01,-6569.33 -3801.96,-6569.33 -3202.86,-6569.33 -1710.9,-6569.33 ; LED2.1@-1648.67,-6569.33 -1710.9,-6569.33 ; LED2.5@-1527.63,-6573.99 -1706.24,-6573.99 -1710.9,-6569.33 ; LED2.5@-1527.63,-6542.33 -1527.63,-6549.43 -1482.9,-6594.15 -1163.42,-6594.15 LED1.1@-1111.6,-6542.33 LED1.5@-989.56,-6542.33 ; LED2.5@-1526.63,-6569.33 LED2.5@-1524.97,-6570.99
  Top Layer w20: pad.1@-4444.92,-4703.15 -4444.92,-4606.51 Q1.3@-4440.56,-4602.15 -4414.92,-4576.51 R47.2@-4414.92,-4517.68
COM2: pad.1@-4594.92,-4703.15 Q2.3 R48.2 | length 243.3
  Top Layer w20: pad.1@-4594.92,-4703.15 -4594.92,-4606.51 Q2.3@-4590.56,-4602.15 -4579.92,-4591.51 R48.2@-4579.92,-4517.68 ; pad.1@-4594.92,-4688.62 -4594.92,-4636.98
COM3: pad.1@-4744.92,-4703.15 Q3.3 R49.2 | length 258.4
  Top Layer w6: -4734.92,-4621.51 -4734.92,-4552.68
  Top Layer w20: pad.1@-4744.92,-4703.15 -4734.92,-4693.15 R49.2@-4734.92,-4517.68
COM4: pad.1@-4894.92,-4703.15 Q4.3 R50.2 | length 239.2
  Top Layer w20: pad.1@-4894.92,-4703.15 -4894.92,-4607.15 -4889.92,-4602.15 R50.2@-4889.92,-4517.68 ; pad.1@-4894.92,-4688.62 -4894.92,-4636.98
COM5: pad.1@-5044.92,-4703.15 Q5.3 R51.2 | length 204
  Top Layer w6: Q5.3@-5044.92,-4606.51 -5044.92,-4597.79 Q5.3@-5040.56,-4602.15 Q5.3@-5044.92,-4606.51
  Top Layer w20: pad.1@-5044.92,-4703.15 Q5.3@-5044.92,-4606.51 ; Q5.3@-5044.92,-4597.79 R51.2@-5044.92,-4517.68 R51.2@-5040.56,-4522.04
COM6: pad.1@-5194.92,-4703.15 Q6.3 R52.2 | length 239.2
  Top Layer w20: R52.2@-5199.92,-4517.68 -5194.92,-4522.68 pad.1@-5194.92,-4703.15 ; pad.1@-5194.92,-4688.62 -5194.92,-4636.98
COM7: pad.1@-5344.92,-4703.15 Q7.3 R53.2 | length 189.6
  Top Layer w20: R53.2@-5354.92,-4517.68 -5354.92,-4592.15 -5344.92,-4602.15 pad.1@-5344.92,-4703.15
COM8: pad.1@-5494.92,-4703.15 Q8.3 R54.2 | length 246.9
  Top Layer w20: R54.2@-5509.92,-4517.68 -5509.92,-4582.79 Q8.3@-5490.56,-4602.15 -5494.92,-4606.51 pad.1@-5494.92,-4703.15 ; pad.1@-5494.92,-4688.62 -5494.92,-4636.98
COM9: pad.1@-5644.92,-4703.15 Q9.3 R55.2 | length 245.4
  Top Layer w20: R55.2@-5664.92,-4517.68 -5644.92,-4537.68 pad.1@-5644.92,-4703.15 ; pad.1@-5644.92,-4688.62 -5644.92,-4636.98
COM10: pad.1@-5794.92,-4703.15 Q10.3 R56.2 | length 251.1
  Top Layer w20: R56.2@-5819.92,-4517.68 -5790.56,-4547.04 Q10.3@-5790.56,-4602.15 -5794.92,-4606.51 pad.1@-5794.92,-4703.15 ; pad.1@-5794.92,-4688.62 -5794.92,-4636.98
COM11: pad.1@-5944.92,-4703.15 Q11.3 R57.2 | length 253.2
  Top Layer w20: R57.2@-5974.92,-4517.68 -5940.56,-4552.04 -5940.56,-4602.15 -5944.92,-4606.51 pad.1@-5944.92,-4703.15 ; pad.1@-5944.92,-4688.62 -5944.92,-4636.98
CS: P1.19 R79.2 | length 496.8
  Top Layer w10: R79.2@-695.47,-2233.15 -573.15,-2233.15 -555,-2215 -555,-2093.23 v1(-554.92,-2093.15)
  Bottom Layer w10: v1(-554.92,-2093.15) -544.92,-2083.15 -544.92,-1978.15 -489.92,-1923.15 P1.19@-489.92,-1893.15
D: J1.5 J5.5 pad.0@-5770,-3972.21 U1.4 U1.5 U6.12 U8.6 | length 4680.6
  Top Layer w8: U1.4@-5151.92,-4104.91 -5151.92,-4159.27 -5101.19,-4210 -4878.23,-4210 -4853.23,-4235 -4780,-4235 -4762.44,-4252.56 -4762.44,-4302.92 -4735.36,-4330 -4693.11,-4330 J1.5@-4644.33,-4281.22
  Top Layer w10: pad.0@-5770,-3994.37 pad.0@-5770,-3972.21 -5711.92,-4030.29 U8.6@-5711.92,-4101.91 -5712,-4101.99 -5712,-4166 -5665.85,-4212.15 -5425.37,-4212.15 -5405.14,-4191.92 -5405.14,-4038.37 -5388.92,-4022.15 -5188.85,-4022.15 -5153,-4058 -5153,-4103.84 U1.4@-5151.92,-4104.91 U1.5@-5201.92,-4104.91 ; v1(-559.92,-1553.15) -559.92,-1598.15 -554.92,-1603.15 U6.12@-484.06,-1603.15
  Bottom Layer w10: J5.5@-2073.77,-241.22 -2073.77,-274.56 -2157.36,-358.15 -2157.36,-928.52 -2089.03,-996.85 -872.97,-996.85 -849.92,-1019.9 -849.92,-1128.15 -631.92,-1346.15 -591.92,-1346.15 -520.92,-1417.15 -520.92,-1514.15 v1(-559.92,-1553.15)
D0: P1.3 U9.3 | length 491.1
  Top Layer w10: v1(300,-1499) 300.08,-1499.08 U9.3@300.08,-1557.91
  Bottom Layer w10: v1(300,-1499) 300,-1501 349,-1550 349,-1857 312.85,-1893.15 P1.3@310.08,-1893.15
D1: P1.4 U9.4 | length 578.5
  Top Layer w10: v1(249.37,-1499) 250.08,-1499.71 U9.4@250.08,-1557.91
  Bottom Layer w10: v1(249.37,-1499) 249.37,-1777.38 265,-1793.02 265,-1948.07 P1.4@310.08,-1993.15
D2: P1.5 U9.5 | length 474.5
  Top Layer w10: U9.5@200.08,-1557.91 201.82,-1556.18 v1(201.82,-1500)
  Bottom Layer w10: v1(201.82,-1500) 233.37,-1531.55 233.37,-1869.86 P1.5@210.08,-1893.15
D3: P1.6 U9.6 | length 609.5
  Top Layer w10: v1(150,-1500) 150.08,-1500.08 U9.6@150.08,-1557.91
  Bottom Layer w10: v1(150,-1500) 210,-1560 210,-1835 190,-1855 190,-1855.91 169.55,-1876.36 169.55,-1952.62 P1.6@210.08,-1993.15
D4: P1.7 U9.10 | length 162
  Top Layer w10: v1(175,-1830) 200.08,-1804.92 U9.10@200.08,-1778.39
  Bottom Layer w10: P1.7@110.08,-1893.15 110.08,-1889.92 175,-1825 v1(175,-1830)
D5: P1.8 U9.11 | length 436.4
  Top Layer w10: v1@181.78,-2055 226.87,-2055 260,-2021.87 260,-1860 250.08,-1850.08 U9.11@250.08,-1778.39
  Bottom Layer w10: P1.8@110.08,-1993.15 171.93,-2055 v1(181.32,-2055)
D6: P1.9 U9.12 | length 425.6
  Top Layer w10: v1(175,-1720) 190,-1705 265,-1705 300.08,-1740.08 U9.12@300.08,-1778.39
  Bottom Layer w10: P1.9@10.08,-1893.15 10.08,-1884.92 v1(175,-1720)
D7: P1.10 U9.13 U10.1 U10.2 | length 1744.8
  Top Layer w10: v1(242,-2075) 272,-2045 342.22,-2045 357.22,-2030 U9.13@357.22,-1792.22 ; U9.13@350.08,-1778.39 357.22,-1785.52 U9.13@357.22,-1792.22 ; U10.2@789.78,-2563.39 U10.1@739.78,-2563.39 600.31,-2563.39 455.08,-2418.15 455.08,-1855.49 424.41,-1824.82 389.81,-1824.82 U9.13@357.22,-1792.22
  Bottom Layer w10: P1.10@-1.24,-2004.46 38.2,-2043.9 115,-2043.9 148.91,-2077.81 239.19,-2077.81 v1(242,-2075)